# Altium PCB IsolationFinal.PcbDoc
Units mm, origin at the board's own origin, x right, y up, seen from the top; angles counter-clockwise.
Board outline 99.19 x 85.47 mm, 2 copper layers (Top Layer, Bottom Layer); 11 components, 7 nets, 36 pads, 1 vias.
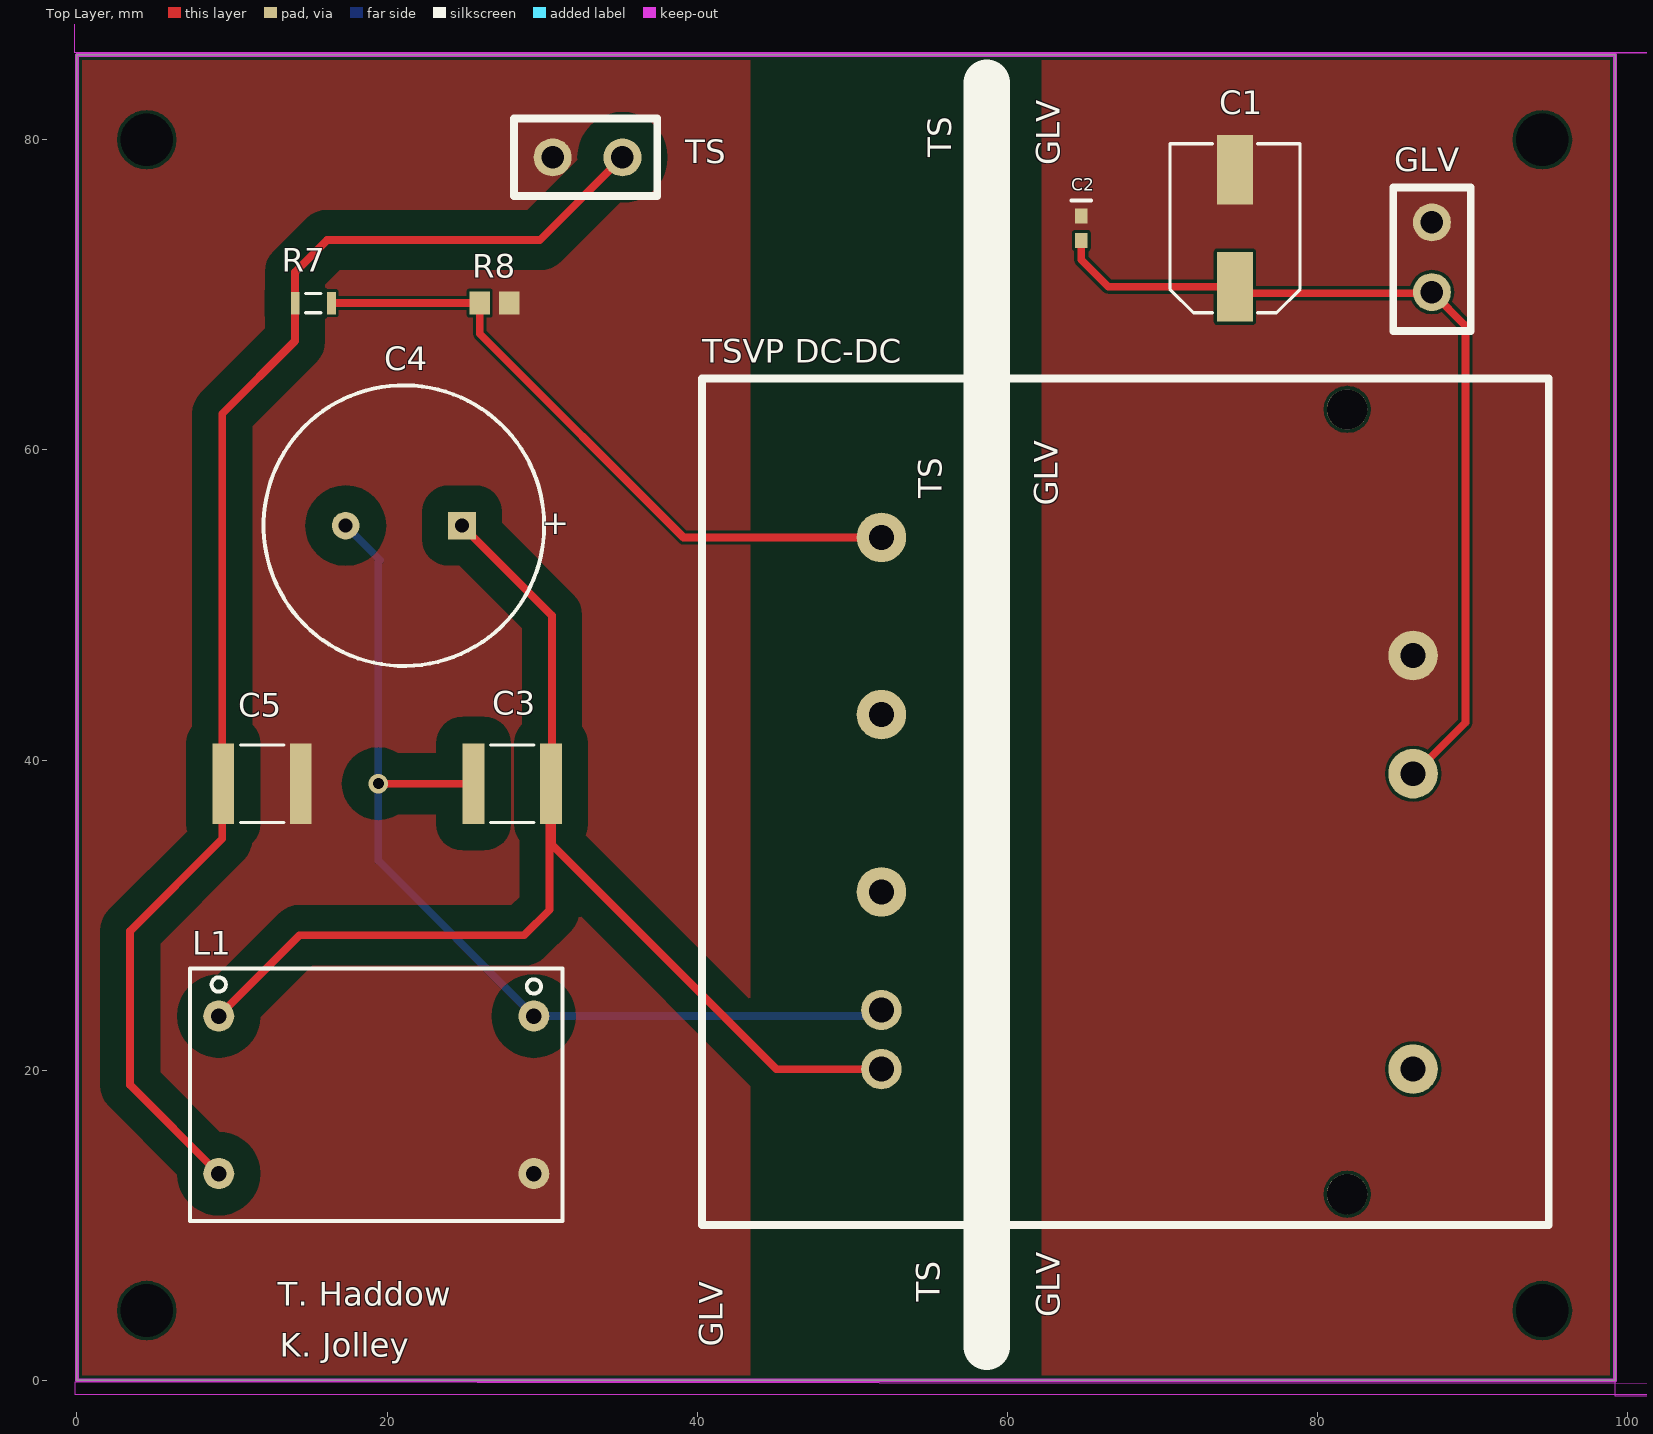
[diagram p0: Top Layer view]
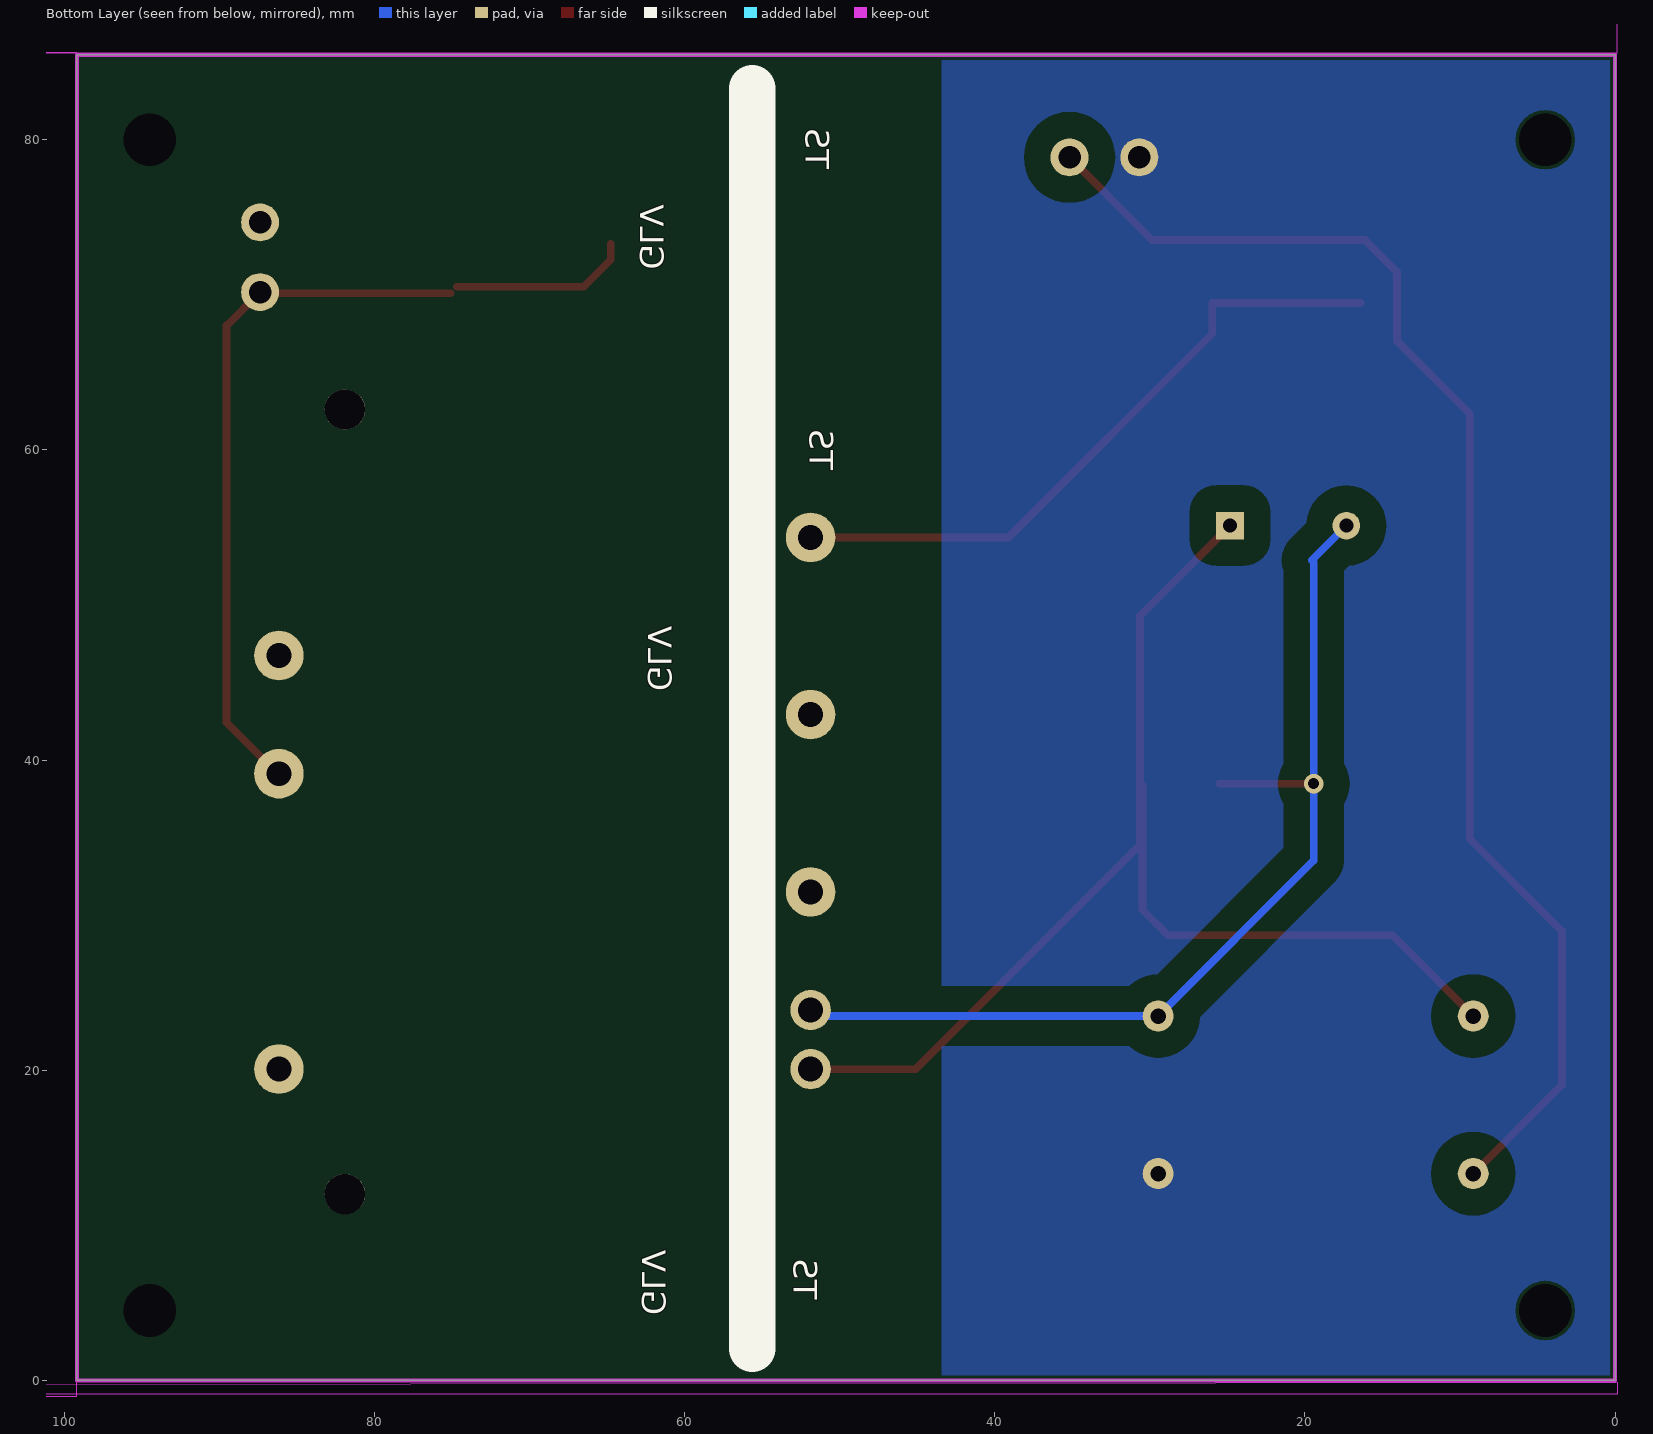
[diagram p1: Bottom Layer view, seen from below]

## Layer stack, top to bottom
Top Solder: solder mask 0.0102, Solder Resist, Dk 3.5
Top Layer: signal copper 0.0356
Dielectric 1: dielectric 0.32, FR-4, Dk 4.8
Bottom Layer: signal copper 0.0356
Bottom Solder: solder mask 0.0102, Solder Resist, Dk 3.5

## Board outline
0,0 0,85.471 99.187,85.471 99.187,0
cut-out: -0.127,100.838 104.394,100.838 104.394,85.598 -0.127,85.598
cut-out: 104.394,-1.016 99.187,-1.016 99.187,85.598 104.394,85.598
cut-out: -0.127,-0.127 -0.127,-0.889 103.632,-0.889 103.632,-0.254

## Design rules (kind name [scope] priority, off if disabled: settings)
Clearance Clearance_1 [InNet('GND') vs (InNet('TS+') AND InNet('TS-'))] p1: gap=6.4 ignorepadtopadclearanceinfootprint=FALSE except(0: Arc-Hole Track-Hole SMDPad-Hole THPad-Hole Via-Hole Fill-Hole Poly-Hole Region-Hole Text-Hole)
Clearance Clearance_2 [InPolygon vs (InNet('TS+') or InNet('NetC3_1') or InNet('NetC3_2'))] p2: gap=1.7 ignorepadtopadclearanceinfootprint=FALSE except(0: Arc-Hole Track-Hole SMDPad-Hole THPad-Hole Via-Hole Fill-Hole Poly-Hole Region-Hole Text-Hole)
Clearance [All] p3: gap=0.2 ignorepadtopadclearanceinfootprint=FALSE except(0: Arc-Hole Track-Hole SMDPad-Hole THPad-Hole Via-Hole Fill-Hole Poly-Hole Region-Hole Text-Hole)
HoleSize [All] p1: absolutevalues=TRUE maxlimit=4 minlimit=0.025 maxpercent=80.000 minpercent=20.000
PolygonConnect [All] p1: connectstyle=Direct reliefconductorwidth=0.254 reliefentries=4 polygonreliefangle="90 Angle" airgapwidth=0.254
RoutingVias [All] p1: holewidth=0.711 width=1.27 viastyle="Through Hole" minholewidth=0.711 minwidth=1.27 maxholewidth=0.711 maxwidth=1.27
SilkToSolderMaskClearance [IsPad] p1: minsilkscreentomaskgap=0.2 clearancetoexposedcopper=TRUE
SolderMaskExpansion [All] p1: expansion=0.102
Width [All] p1: maxlimit=3 minlimit=0.5 preferedwidth=0.5
28 further rules are at their usual default settings.

## Components (designator, comment, footprint, x,y, rotation, side; value= is the part's Value field where it differs from the comment)
C1 "220uF" EEE-1VA221UP 74.676,74.295 r90 top
C2 "C0603" 0603 64.77,74.295 r270 top value=0.1uF
C3 "C0603" 2220 28.067,38.481 r0 top value=1uF
C4 "100uF" NichiconCAP 21.082,55.118 r180 top
C5 "C0603" 2220 11.938,38.481 r180 top value=1uF
GLV "Header 2" "2 PIN 3.5mm" 87.376,74.676 r270 top
L1 "10mH" 52106C 29.464,23.495 r180 top
R7 "" "0805 (High Density)" 15.24,69.469 r180 top value=1.26M
R8 "20k" 6-0805 26.924,69.469 r180 top
TS "Header 2" "2 PIN 3.5mm" 35.179,78.867 r180 top
"TSVP DC-DC" "RUW15SL 12C" "RUW15SL 12C" 42.315,62.611 r0 top

## Footprints (in the part's own frame and the unit in brackets; to place one, negate y for a bottom-side part, rotate by r counter-clockwise, add the part's x,y. Pads: shape width x height; smd on the part's side, far side on the other; paste and mask are expansions set on the pad)
"2 PIN 3.5mm" [mm]
  round 2.45 hole 1.45: 1(0,0) 2(4.5,0)
  silkscreen extent -2.25,-2.5 7,2.5
6-0805 [mm] "Chip Resistor; Body 2 x 1.2 mm (LxW typ)"
  rect 1.3x1.5 smd: 1(-0.95,0) 2(0.95,0)
0603 [mil] "Chip Capacitor; Body 1.6 x 0.8 mm (LxW typ)"
  rect 38x31 smd: 1(-31.5,0) 2(31.5,0)
  silkscreen extent -70,-25 -70,25
"0805 (High Density)" [mm] "Panasonic 0805 Resistor"
  rect 0.55x1.45 smd: 1(-1.175,0) 2(1.175,0)
  silkscreen extent -0.5,-0.63 0.5,0.63, body extent -0.9,-0.58 0.9,0.58, height 0.7
2220 [mm] "Chip Capacitor, Body 5.7x5.0mm, IPC High Density"
  rect 1.4x5.2 smd: 1(-2.5,0) 2(2.5,0)
  silkscreen extent -1.4,-2.5 1.4,2.5, body extent -2.95,-2.63 2.95,2.63, height 1.4
52106C [mm] "MuRata 10mH Common Mode Choke"
  round 2 hole 1: 1(0,0) 2(20.32,0) 3(20.32,10.16) 4(0,10.16)
  silkscreen extent -1.84,-3.07 22.16,13.23
EEE-1VA221UP [mm] "Panasonic Aluminum Electrolytic Capacitor, 220uF, 35V, 20%"
  rect 4.5x2.3 smd: 1(-3.775,0) 2(3.775,0)
  silkscreen extent -5.45,-4.2 5.45,4.2, body extent -5.45,-4.25 5.45,4.25, height 10.5
NichiconCAP [mm]
  rect 1.778x1.778 hole 0.9: 1(-3.75,0)
  round 1.778 hole 0.9: 2(3.75,0)
  silkscreen extent -9.05,-9.05 9.05,9.05
"RUW15SL 12C" [mm] "MuRata RC-DC"
  round 3.2 hole 1.6: 1(9.56,-8.25)
  round 3.2 / inner round 2.6 / far side round 3.2 hole 1.6: 2(9.56,-19.68) 3(9.56,-31.11) 6(43.85,-42.54) 7(43.85,-23.49) 8(43.85,-15.87)
  round 2.6 hole 1.6: 4(9.56,-38.73) 5(9.56,-42.54)
  round 2.6 hole 2.6 unplated: B(39.6,0) D(39.6,-50.6)
  silkscreen extent -2,-52.6 52.6,2, body extent 0,-50.6 50.61,0, height 20.5

## Part data
C1: library part "Cap Pol1", "Panasonic Electrolytic 35V, 20% EEE-1VA221UP"
C2: "C0603C104K3RACTU", PackageDocument=Mar-2001, Code_IPC="1608 [0603]", Code_JEITA=0603, ComponentLink1Description="Manufacturer Link", ComponentLink1URL=http://www.kemet.com/, ComponentLink2Description=Datasheet, ComponentLink2URL=http://www.kemet.com/kemet/web/homepage/kechome.nsf/vapubfilesname/F3102TA.pdf/$file/F3102TA.pdf, DatasheetDocument=Mar-2001, LatestRevisionDate=19-Mar-2004, LatestRevisionNote="Silkscreen size reduced.", Note="Footprint corresponds to dimensions for bulk cassette packaging. This case size has tightened tolerances.", PackageReference=0603, Published=17-Jul-2002, Publisher="Altium Limited"
C3: "GRM55DR72E105KW01L", PackageDocument=Mar-2001, Code_IPC="1608 [0603]", Code_JEITA=0603, ComponentLink1Description="Manufacturer Link", ComponentLink1URL=http://www.kemet.com/, ComponentLink2Description=Datasheet, ComponentLink2URL=http://www.kemet.com/kemet/web/homepage/kechome.nsf/vapubfilesname/F3102TA.pdf/$file/F3102TA.pdf, DatasheetDocument=Mar-2001, LatestRevisionDate=19-Mar-2004, LatestRevisionNote="Silkscreen size reduced.", Note="Footprint corresponds to dimensions for bulk cassette packaging. This case size has tightened tolerances.", PackageReference=0603, Published=17-Jul-2002, Publisher="Altium Limited"
C4: library part "Cap Pol1", "Nichicon 200V 100uF TH Capacitor"
C5: "GRM55DR72E105KW01L"
GLV TS: "Header, 2-Pin", LatestRevisionDate=17-Jul-2002, LatestRevisionNote="Re-released for DXP Platform.", Publisher="Altium Limited"
L1: library part "Trans Ideal", "MuRata 52106C Common Choke", Code_IEC=1005, Code_JEITA=0402, LatestRevisionDate=29-May-2009, LatestRevisionNote="IPC-7351 Footprint Added.", PackageDescription="Chip Inductor", PackageReference=0402-A, Published=8-Jun-2000, Publisher="Altium Limited"
R7: library part Res1, "Resistor", LatestRevisionDate=17-Jul-2002, LatestRevisionNote="Re-released for DXP Platform.", PackageDescription="Axial Device, Thru-Hole; 2 Leads; 0.3 in Pin Spacing", PackageReference=AXIAL-0.3, Published=8-Jun-2000, Publisher="Altium Limited"
R8: library part ERJ6EN, "Precision Thick Film Chip Resistor, 10 Ohm to 2.2M Ohm Range, 1% Tolerance, 0805 Size, 0.1 W", PackageDocument=Mar-2003, Code_IPC="2012 [0805]", ComponentLink1Description="Manufacturer Link", ComponentLink1URL=http://www.panasonic.com/industrial/components/resistive_products.htm, ComponentLink2Description=Datasheet, ComponentLink2URL=http://www.panasonic.com/industrial/components/pdf/AOA0000CE2.pdf, LatestRevisionDate=19-Mar-2004, LatestRevisionNote="Silkscreen size reduced.", PackageReference=6-0805, Published=17-Dec-2003, Publisher="Altium Limited"

## Free pads (board coordinates)
  round 0 hole 3.4: "screw hole"(4.5,4.5) "Screw hole"(4.5,80) "Screw hole"(94.5,4.5) "Screw hole"(94.5,80)

## Via types
v1: diameter 1.27, hole 0.711, Top Layer to Bottom Layer, 1 vias

## Nets (pads, with @x,y where several pads share a name; then routed paths per layer and width w, separated by ;. In a path a pad name is that pad's centre, name@x,y a point inside that pad or via, vN(x,y) a via of type N, cw(c..) or ccw(c..) an arc to the next point about the centre after c; other vN are vias at no path point)
GND: "TSVP DC-DC.8" C1.2 C2.1 GLV.1
NetC3_1: "TSVP DC-DC.4" C3.1 C4.2 L1.1 | length 65.5
  Top Layer w0.5: v1(19.431,38.481) C3.1@25.527,38.481
  Bottom Layer w0.5: C4.2 19.558,52.892 19.431,52.765 v1(19.431,38.481) 19.431,33.528 L1.1 51.367,23.495 51.875,24.003
NetC3_2: "TSVP DC-DC.5" C3.2 C4.1 L1.2 | length 82.2
  Top Layer w0.5: L1.2 14.351,28.702 28.829,28.702 30.48,30.353 C3.2@30.48,38.354 ; C4.1 30.632,49.318 30.632,34.544 45.11,20.066 51.724,20.066
NetR7_1: "TSVP DC-DC.1" R7.1 R8.2 | length 42.7
  Top Layer w0.5: R7.1 R8.2 25.974,67.498 39.116,54.356 51.724,54.356
TS+: C5.2 L1.3 R7.2 TS.1 | length 89.1
  Top Layer w0.5: L1.3 3.429,19.05 3.429,28.981 9.373,34.925 9.373,62.332 14.065,67.024 R7.2 14.065,71.469 16.129,73.533 29.845,73.533 TS.1
TS-: C5.1 L1.4 R8.1 TS.2
"TSVP 12V": "TSVP DC-DC.7" C1.1 C2.2 GLV.2 | length 57.4
  Top Layer w0.5: C2.2@64.77,73.279 64.77,72.263 66.513,70.52 C1.1 ; C1.1@75.092,70.104 87.448,70.104 89.535,68.017 89.535,42.418 86.36,39.243 85.979,39.243
pads on no net: "TSVP DC-DC.2" "TSVP DC-DC.3" "TSVP DC-DC.6" "TSVP DC-DC.B" "TSVP DC-DC.D"

## Polygon pours and split planes (outlines as drawn)
GND on Top Layer "ground plane" (solid, pour order 4): 62.23,101.092 62.484,100.838 104.394,100.838 104.394,-0.762 104.14,-1.016 62.23,-1.016
TS- on Top Layer "top layer" (solid, pour order 6): -0.127,-0.889 43.434,-0.889 43.434,100.711 -0.127,100.711
TS- on Bottom Layer "Bottom layer" (solid, pour order 8): -0.127,100.838 43.434,100.838 43.434,-1.016 43.18,-0.762 -0.127,-0.762

## Keep-outs
Keep-Out Layer:
  lines w0.254: 0,0 99.187,0 99.187,85.471 0.254,85.471 0,85.471 0,0

## Silkscreen, mask and mechanical layers (free items; w line width, h text height)
Top Overlay:
  lines w3: 58.674,2.159 58.674,83.693
  text "TS" at 56.388,78.867 h1.52 r90
  text "GLV" at 63.373,78.359 h1.52 r90
  text "TS" at 55.753,56.896 h1.52 r90
  text "GLV" at 63.246,56.388 h1.52 r90
  text "TS" at 55.626,5.08 h1.52 r90
  text "T. Haddow" at 12.954,4.826 h1.52
  text "GLV" at 63.373,4.064 h1.52 r90
  text "GLV" at 41.656,2.159 h1.52 r90
  text "K. Jolley" at 13.081,1.524 h1.52
Bottom Overlay:
  lines w3: 55.626,2.032 55.626,83.312
  text "TS" at 52.197,78.105 h1.52 r90
  text "GLV" at 62.865,71.628 h1.52 r90
  text "TS" at 51.943,58.674 h1.52 r90
  text "GLV" at 62.357,44.45 h1.52 r90
  text "TS" at 52.959,5.207 h1.52 r90
  text "GLV" at 62.738,4.191 h1.52 r90
Mechanical 1:
  the board outline again, w0.254

## Text inside footprints (layer, text, board x,y; h text height)
C4: Top Overlay "+" at 31.75,55.88 h1.52 r180